# Altium PCB power.PcbDoc
Units mm, origin at the board's own origin, x right, y up, seen from the top; angles counter-clockwise.
Board outline 76.58 x 75.82 mm, 2 copper layers (Top Layer, Bottom Layer); 15 components, 8 nets, 36 pads, 0 vias.
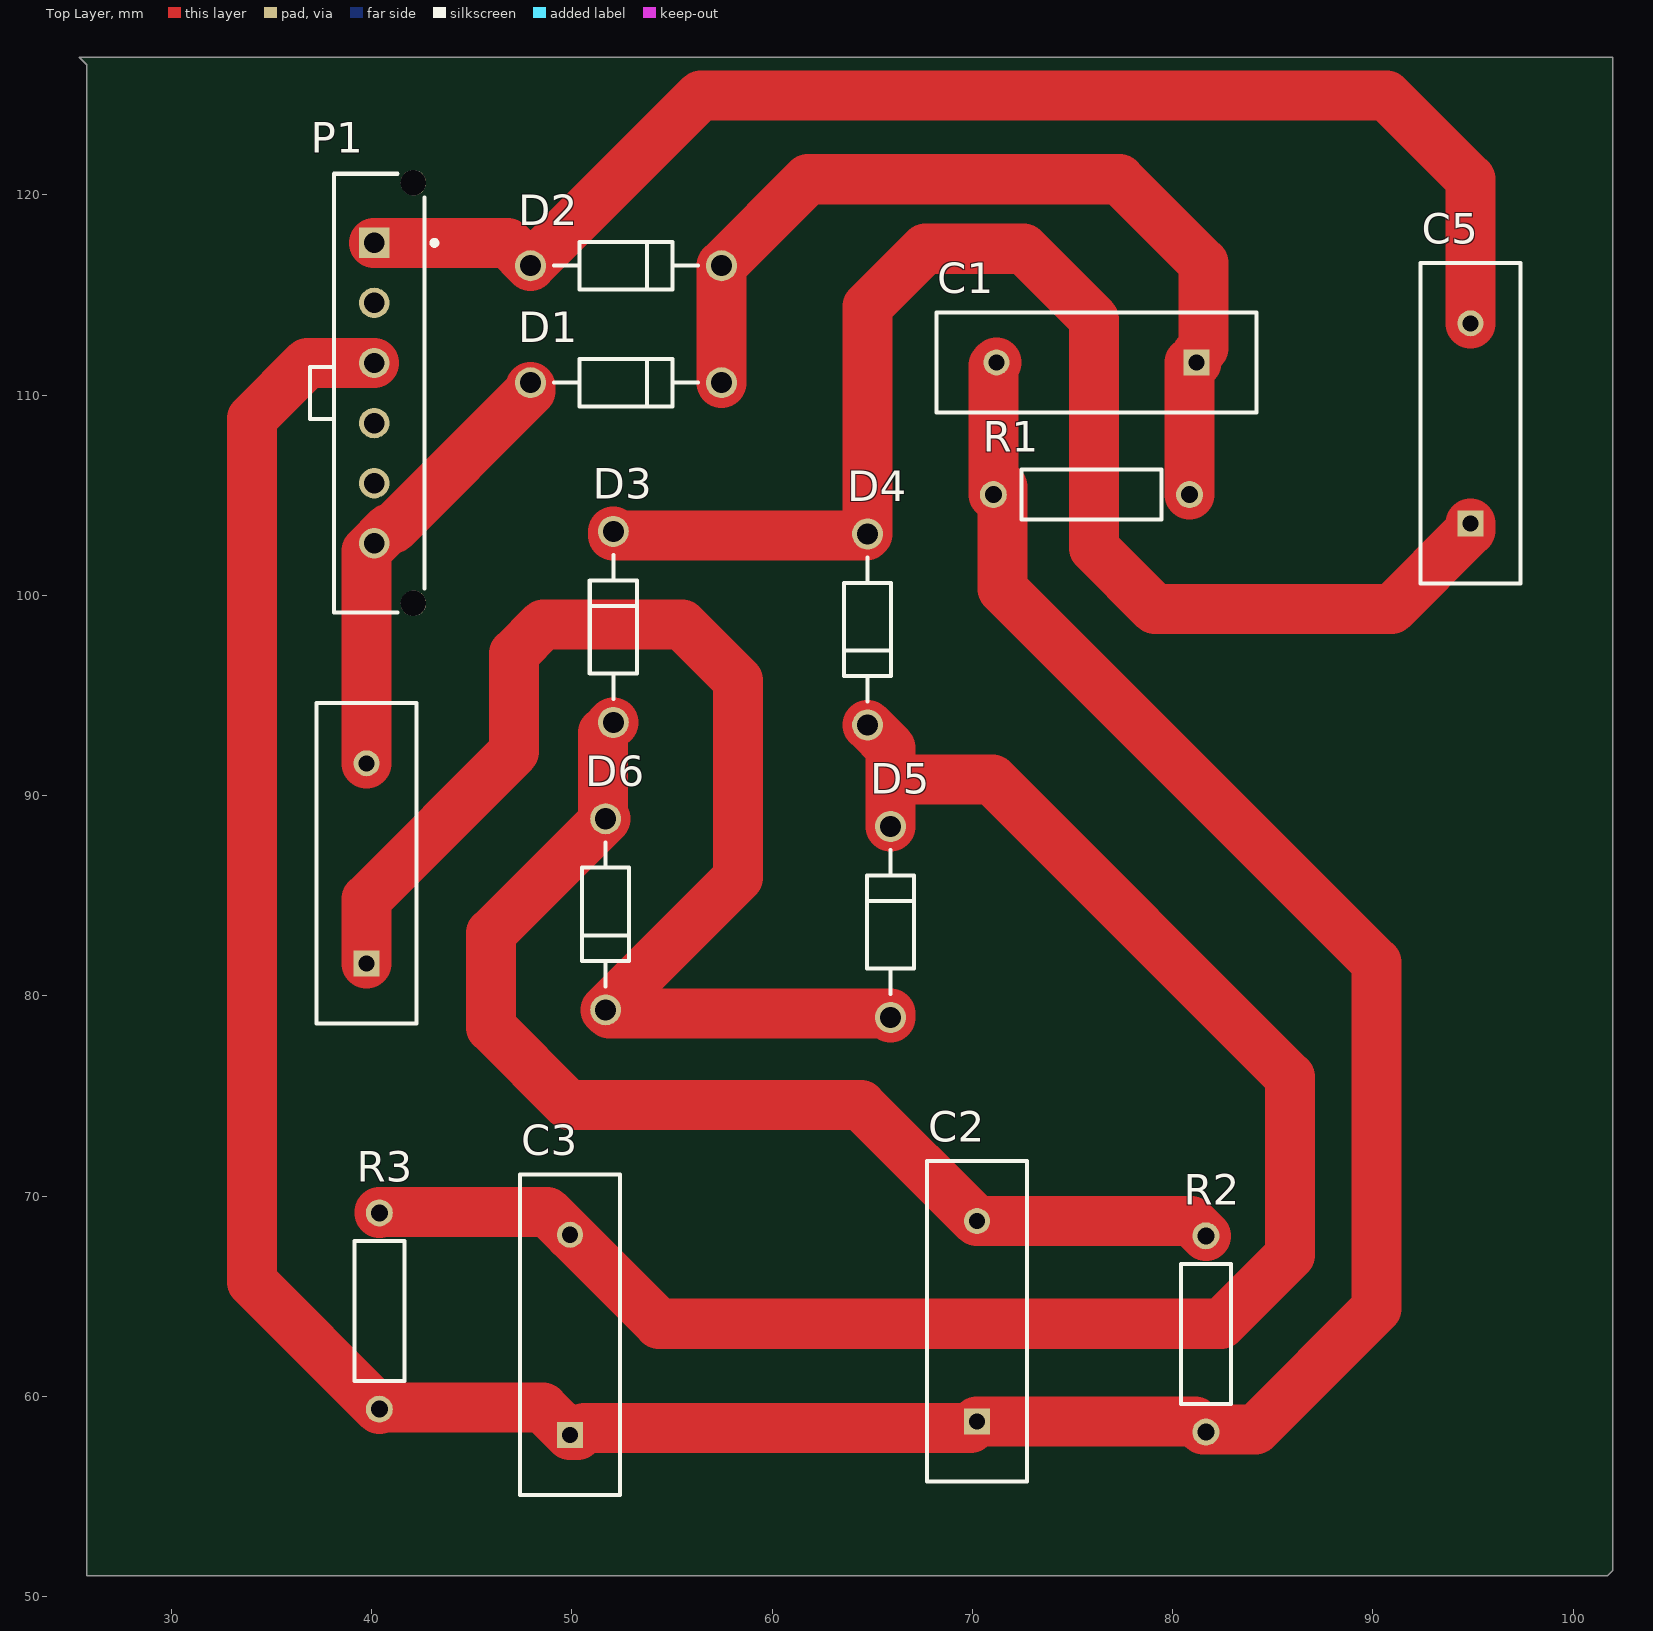
[diagram p0: Top Layer view]
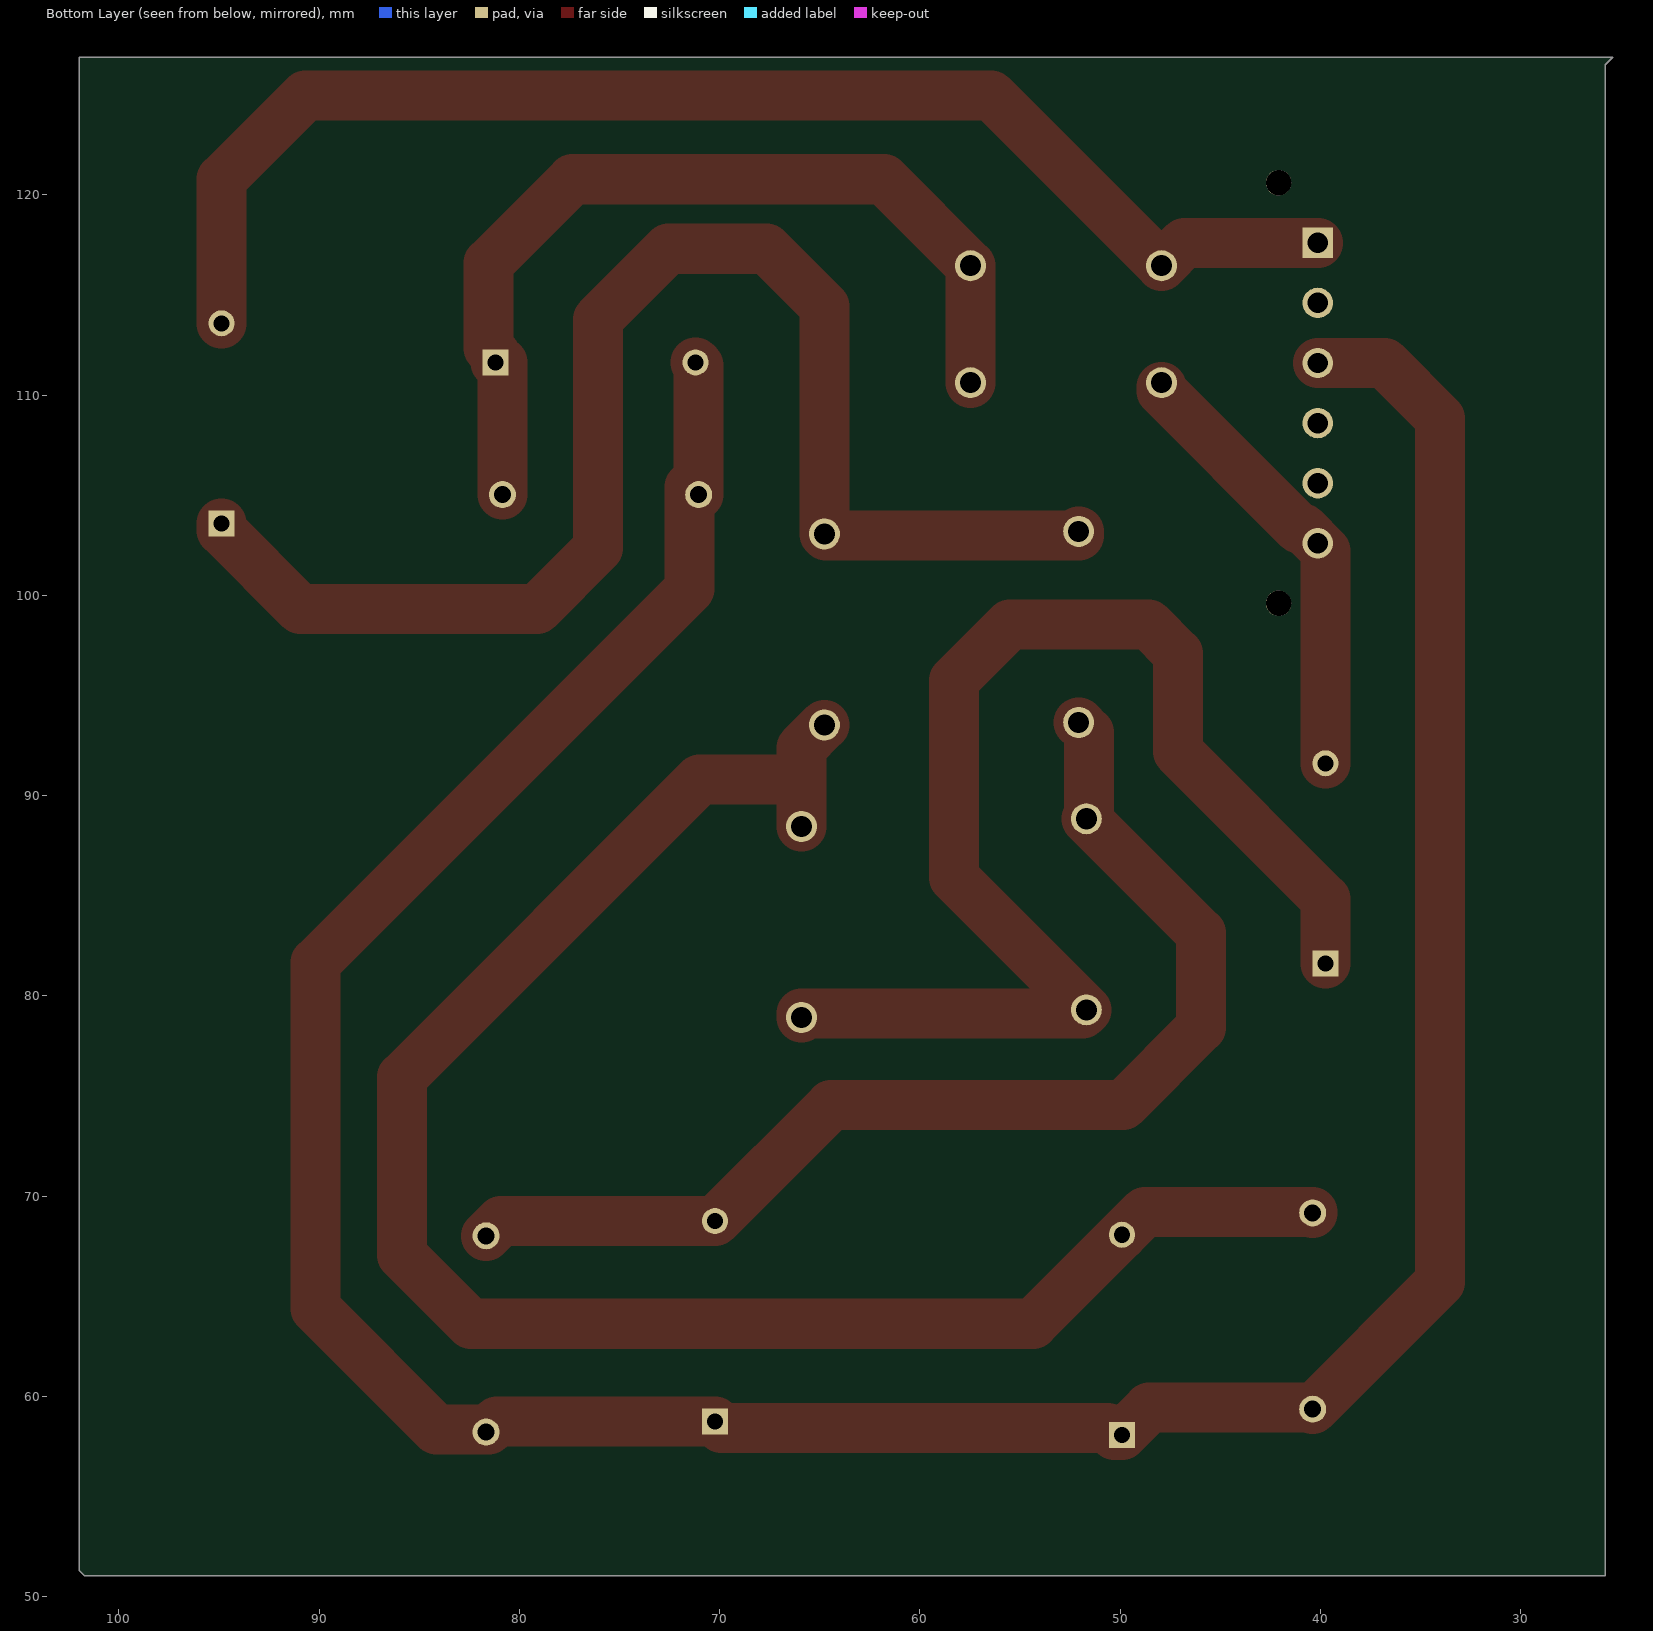
[diagram p1: Bottom Layer view, seen from below]

## Layer stack, top to bottom
Top Solder: solder mask 0.0102, Solder Resist, Dk 3.5
Top Layer: signal copper 0.0356
Dielectric 1: dielectric 0.32, FR-4, Dk 4.8
Bottom Layer: signal copper 0.0356
Bottom Solder: solder mask 0.0102, Solder Resist, Dk 3.5

## Board outline
25.4,126.873 25.781,126.492 25.781,51.054 101.727,51.054 101.981,51.308 101.981,126.873

## Design rules (kind name [scope] priority, off if disabled: settings)
Clearance [All] p1: gap=0.254 ignorepadtopadclearanceinfootprint=FALSE except(0: Arc-Hole Track-Hole SMDPad-Hole THPad-Hole Via-Hole Fill-Hole Poly-Hole Region-Hole Text-Hole)
PolygonConnect [All] p1: connectstyle=Relief reliefconductorwidth=0.254 reliefentries=4 polygonreliefangle="90 Angle" airgapwidth=0.254
RoomDefinition power [InComponentClass('power')] p1: confinementstyle=ConfineIn formatcopy=TRUE lockcomponents=FALSE outline 178.943,26.924 243.205,26.924 243.205,46.228 178.943,46.228
RoutingVias [All] p1: holewidth=0.711 width=1.27 viastyle="Through Hole" minholewidth=0.711 minwidth=1.27 maxholewidth=0.711 maxwidth=1.27
SolderMaskExpansion [All] p1: expansion=0.102 istentingtop=FALSE
Width [All] p1: maxlimit=4 minlimit=2.5 preferedwidth=2.5 bottomlayer_minwidth=0 bottomlayer_maxwidth=0.8 bottomlayer_prefwidth=0.254 minimp=50.000000 maximp=50.000000 favimp=50.000000
30 further rules are at their usual default settings.

## Components (designator, comment, footprint, x,y, rotation, side; value= is the part's Value field where it differs from the comment)
C1 "3000u" FP-VY1472M63Y5UQ6TV0-MFG 76.2,111.633 r180 top
C2 "1000u" FP-VY1472M63Y5UQ6TV0-MFG 70.231,63.754 r90 top
C3 "1000u" FP-VY1472M63Y5UQ6TV0-MFG 49.911,63.072 r90 top
C4 "6u" FP-VY1472M63Y5UQ6TV0-MFG 39.751,86.614 r90 top
C5 "6u" FP-VY1472M63Y5UQ6TV0-MFG 94.869,108.585 r90 top
D1 "1N4001" ONSC-AXIAL_LEAD-2-59-10_P 52.705,110.617 r180 top
D2 "1N4001" ONSC-AXIAL_LEAD-2-59-10_P 52.705,116.459 r180 top
D3 "1N4001" ONSC-AXIAL_LEAD-2-59-10_P 52.07,98.425 r270 top
D4 "1N4001" ONSC-AXIAL_LEAD-2-59-10_P 64.77,98.298 r90 top
D5 "1N4001" ONSC-AXIAL_LEAD-2-59-10_P 65.913,83.693 r270 top
D6 "1N4001" ONSC-AXIAL_LEAD-2-59-10_P 51.689,84.074 r90 top
P1 "66200611122" 66200611122 40.387,110.102 r90 top
R1 "1 k" OMTE-RES7X2.5-2 75.946,105.029 r0 top
R2 "1 k" OMTE-RES7X2.5-2 81.661,63.119 r90 top
R3 "1 k" OMTE-RES7X2.5-2 40.386,64.262 r270 top

## Footprints (in the part's own frame and the unit in brackets; to place one, negate y for a bottom-side part, rotate by r counter-clockwise, add the part's x,y. Pads: shape width x height; smd on the part's side, far side on the other; paste and mask are expansions set on the pad)
66200611122 [mm] "3.00mm Male Single Row Vertical Header, 6p"
  rect 1.52x1.52 hole 1.02: 1(7.5,0.255)
  round 1.52 hole 1.02: 2(4.5,0.255) 3(1.5,0.255) 4(-1.5,0.255) 5(-4.5,0.255) 6(-7.5,0.255)
  round 1.27 hole 1.27 unplated: MH1(-10.5,-1.705) MH2(10.5,-1.705)
  silkscreen extent -10.95,-2.88 10.95,3.46, body extent -10.82,-2.19 10.83,3.38, height 9.93
FP-VY1472M63Y5UQ6TV0-MFG [mm]
  rect 1.3x1.3 hole 0.8 paste-1000 mask+0: 1(-5,0)
  round 1.3 hole 0.8 paste-1000 mask+0: 2(5,0)
  silkscreen extent -8,-2.5 8,2.5, body extent -8.1,-2.6 8.1,2.6, height 0.25
OMTE-RES7X2.5-2 [mm] "Resistor, Axial; Body 7x2.5mm, Lead Dia. 0.6mm"
  round 1.35 hole 0.85: 1(-4.9,0) 2(4.9,0)
  silkscreen extent -3.5,-1.25 3.5,1.25, body extent -3.5,-1.25 3.5,1.25, height 2.5
ONSC-AXIAL_LEAD-2-59-10_P [mm] "AXIAL, 2-Leads, Diameter 2.35mm"
  round 1.55 hole 1.05: 1(-4.77,0) 2(4.77,0)
  silkscreen extent -3.59,-1.17 3.59,1.17

## Part data
C1 C2 C3 C4 C5: library part CMP-02417-000050-1, "CAP CER 4700PF 760VAC Y5U RADIAL", Capacitance=4.7nF, Case/Package=Radial, Dielectric=Y5U, Max Operating Temperature=125°C, Min Operating Temperature=-40°C, Package Quantity=500, Resistor Type=Ceramic, Tolerance=20%, Voltage=500V, Construction=RADIAL, Contact Plating=Tin, Depth=5mm, Diameter=16mm, Height=19mm, Height - Seated (Max)=0.787inch, Lead Diameter=0.6mm, Lead Pitch=10mm, Lead/Base Style=Kinked, Mount="Through Hole", Packaging="Tape and Reel", Radiation Hardening=No, RoHS Compliant=Yes, Series=VY1, Termination=Radial, Thickness=5mm, Voltage Rating (AC)=500V, Voltage Rating (DC)=500V
D1 D2 D3 D4 D5 D6: library part CMP-0902-00117-1, "Standard Recovery Rectifier, 2-Pin Axial_Lead, Pb-Free, Bulk Bag", Manufacturer="On Semiconductor", ComponentLink1Description="Manufacturer URL", ComponentLink1URL=http://www.onsemi.com/, ComponentLink2Description=Datasheet, ComponentLink2URL=http://www.onsemi.com/pub_link/Collateral/1N4001-D.PDF, ComponentLink3Description="Package Specification", ComponentLink3URL=http://www.onsemi.cn/pub_link/Collateral/59-10.PDF, DatasheetVersion="Rev. 13", IFSM Max (A)=30, IO(rec) Max (A)=1, Mounting Technology="Through Hole", PackageDescription="2-Pin, Axial Lead, Diameter 2.35 mm", PackageReference=AXIAL_LEAD-2-59-10, PackageVersion="Rev. U, 02/2005", Packing="Bulk Bag", PartNumber=1N4001, RoHS=TRUE, Type="Standard Recovery", VRRM Max (V)=50
P1: library part CMP-1502-00444-1, "THT Male Header WR-MPC3, Vertical, Single Row, pitch 3 mm, 6 pins", Contact Resistance=10mOhm, Manufacturer="Wurth Elektronik", Operating Temperature=-40to105degC, Working Voltage=250VAC, Datasheet URL=https://katalog.we-online.de/em/datasheet/6620xx11122.pdf, Gender=Male, Manufacturer URL=http://www.we-online.de, Mounting Technology=THT, Orientation=Vertical, Package Reference=66200611122, Packaging=Tube, Part Number=66200611122, Pin Number=6, Pitch=3mm, Publisher=WurthElektronik
R1 R2 R3: library part CMP-2000-06865-1, "Little Demon(R) Carbon Composition Molded OD Series, 250 V, 10 KOhm, +/-5%, -70 to 130 degC, 2-Pin THD, RoHS, Bulk", Manufacturer=Ohmite, Operating Temperature=-, Package / Case=Axial, Package Description="2-Pin THD Resistor, Body 7 x 2.5 mm, Lead Dia. 0.6 mm", Package Reference=RES7X2.5, PartNumber=OD103JE, Power (Watts)=0.25W,1/4W, Power Rating=0.25W, Resistance (Ohms)=10k, Standard Package=100, Tolerance=±5%, Catalog Drawings=OD,OF,OASeries, Category=Resistors, Composition=CarbonComposition, Datasheet URL=http://www.ohmite.com/cat/res_od_of_oa.pdf, Datasheet Version=06/2016, EDA / CAD Models=DownloadfromAcceleratedDesigns, Family=ThroughHoleResistors, Features=PulseWithstanding, Height=-, Manufacturer URL=http://www.ohmite.com/, Mounting Technology=ThroughHole, Number of Terminations=2, Online Catalog=OD,OF,OASeries,LittleDemon®, Packaging=Bulk, RoHS Information="LittleDemon\"E\"SeriesMaterialDeclaration", Series=LittleDemon®OD, Size / Dimension="0.098\"Diax0.276\"L(2.50mmx7.00mm)", Supplier Device Package=Axial, Temperature Coefficient=-

## Nets (pads, with @x,y where several pads share a name; then routed paths per layer and width w, separated by ;. In a path a pad name is that pad's centre, name@x,y a point inside that pad or via, vN(x,y) a via of type N, cw(c..) or ccw(c..) an arc to the next point about the centre after c; other vN are vias at no path point)
"+30 V": C4.2 D1.2 P1.6 | length 22.8
  Top Layer w2.5: C4.2@39.751,92.075 C4.2 39.751,102.221 40.868,103.338 41.07,103.338 47.935,110.203 D1.2@47.935,110.405
"-30 V": C5.2 D2.2 P1.1 | length 67.7
  Top Layer w2.5: P1.1 46.792,117.602 D2.2 56.444,124.968 90.678,124.968 94.869,120.777 C5.2
GND: C1.2 C2.1 C3.1 P1.3 R1.1 R2.1 R3.2 | length 168.1
  Top Layer w2.5: P1.3 36.799,111.602 34.036,108.839 34.036,65.712 R3.2 40.386,59.436 48.547,59.436 C3.1 50.292,58.072 50.64,58.42 69.897,58.42 C2.1 81.126,58.754 81.534,58.346 84.127,58.346 90.17,64.389 90.17,81.661 71.501,100.33 R1.1@71.501,105.41 ; R1.1 71.046,111.479 C1.2
NetC1_1: C1.1 D1.1 D2.1 R1.2 | length 45.1
  Top Layer w2.5: D1.1 D2.1 61.793,120.777 77.343,120.777 81.534,116.586 81.534,112.348 81.2,112.014 C1.1 ; R1.2 C1.1@80.846,111.633
NetC2_2: C2.2 D3.2 D6.2 R2.2 | length 57.9
  Top Layer w2.5: D3.2 51.562,93.147 51.562,88.9 51.618,88.844 D6.2 45.974,83.129 45.974,78.426 49.851,74.549 64.436,74.549 C2.2 80.926,68.754 R2.2
NetC3_2: C3.2 D4.1 D5.1 R3.1 | length 90.1
  Top Layer w1: D5.1@65.913,88.138 D5.1
  Top Layer w2.5: R3.1 40.386,69.215 48.768,69.215 C3.2 54.356,63.627 82.423,63.627 85.852,67.056 85.852,75.946 70.993,90.805 65.913,90.805 ; D4.1 65.913,92.385 65.913,90.805 ; D5.1 65.913,90.805
NetC4_1: C4.1 D5.2 D6.1 | length 65.2
  Top Layer w2.5: C4.1 39.751,84.836 47.117,92.202 47.117,97.088 48.581,98.552 55.499,98.552 58.293,95.758 58.293,85.908 D6.1 51.872,79.121 65.913,79.121 D5.2
NetC5_1: C5.1 D3.1 D4.2 | length 71.7
  Top Layer w2.5: D3.1 52.07,102.997 64.699,102.997 D4.2 64.77,114.427 67.651,117.308 72.557,117.308 76.08,113.785 76.08,102.355 79.121,99.314 90.932,99.314 94.869,103.251 C5.1
pads on no net: P1.2 P1.4 P1.5 P1.MH1 P1.MH2